# Altium PCB WallDigitalClock.PcbDoc
Units mm, origin at the board's own origin, x right, y up, seen from the top; angles counter-clockwise.
Board outline 214 x 90 mm, 2 copper layers (Top Layer, Bottom Layer); 8 components, 17 nets, 52 pads, 0 vias.
Unrouted connection lines stored in the file: 31.
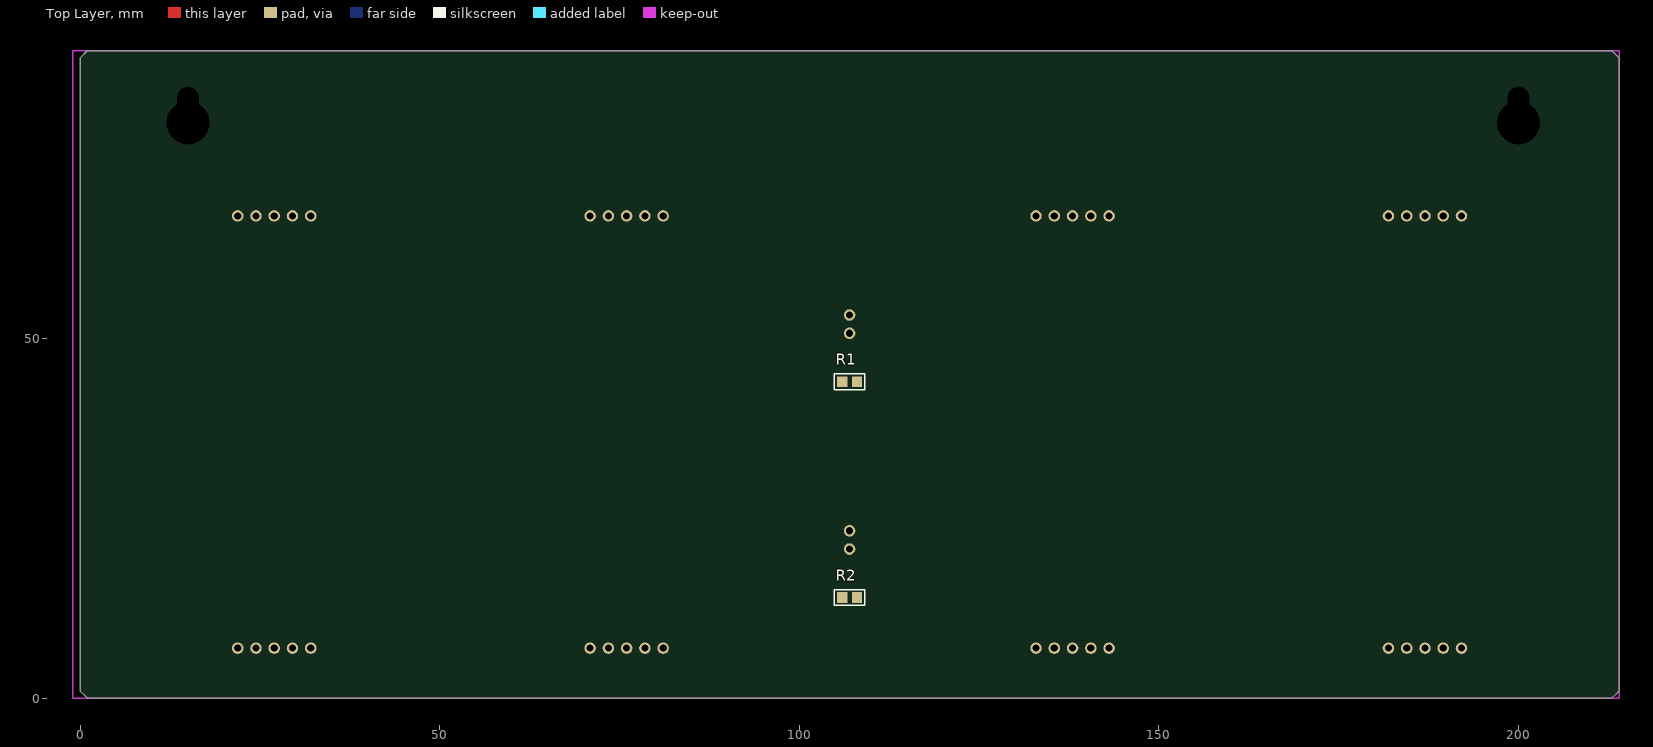
[diagram p0: Top Layer view]
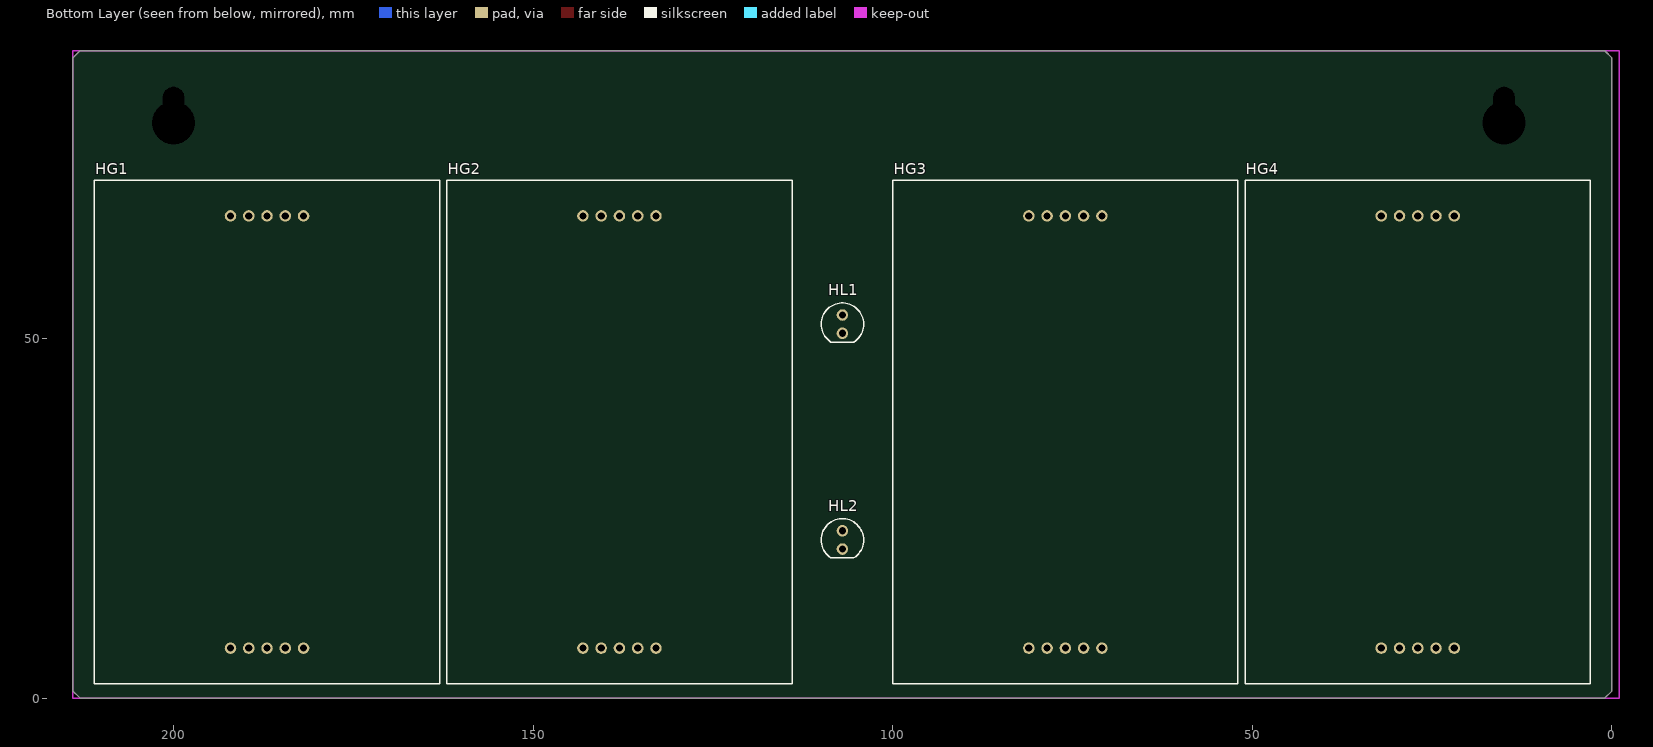
[diagram p1: Bottom Layer view, seen from below]

## Layer stack, top to bottom
Top Solder: solder mask 0.0102, Solder Resist, Dk 3.5
Top Layer: signal copper 0.0356
Dielectric 1: dielectric 0.32, FR-4, Dk 4.8
Bottom Layer: signal copper 0.0356
Bottom Solder: solder mask 0.0102, Solder Resist, Dk 3.5

## Board outline
1,0 213,0 214,1 214,89 213,90 1,90 0,89 0,1

## Design rules (kind name [scope] priority, off if disabled: settings)
Clearance [All] p1: gap=0.254 ignorepadtopadclearanceinfootprint=FALSE except(0: Arc-Hole Track-Hole SMDPad-Hole THPad-Hole Via-Hole Fill-Hole Poly-Hole Region-Hole Text-Hole)
PolygonConnect [All] p1: connectstyle=Relief reliefconductorwidth=0.254 reliefentries=4 polygonreliefangle="90 Angle" airgapwidth=0.254
RoutingVias [All] p1: holewidth=0.711 width=1.27 viastyle="Through Hole" minholewidth=0.711 minwidth=1.27 maxholewidth=0.711 maxwidth=1.27
SolderMaskExpansion [All] p1: expansion=0.102
Width [All] p1: maxlimit=0.254 minlimit=0.254 preferedwidth=0.254
30 further rules are at their usual default settings.

## Components (designator, comment, footprint, x,y, rotation, side; value= is the part's Value field where it differs from the comment)
HG1 "SA23-11" SA23-11 187,37 r180 bottom locked value=SA23-11GWA
HG2 "SA23-11" SA23-11 138,37 r180 bottom locked value=SA23-11GWA
HG3 "SA23-11" SA23-11 76,37 r180 bottom locked value=SA23-11GWA
HG4 "SA23-11" SA23-11 27,37 r180 bottom locked value=SA23-11GWA
HL1 "Green" LED_5mm_Green 107,52 r270 bottom value=L-1503GT
HL2 "Green" LED_5mm_Green 107,22 r270 bottom value=L-1503GT
R1 "Resistor" RES0805WS 107,44 r0 top value=Value
R2 "Resistor" RES0805WS 107,14 r0 top value=Value

## Footprints (in the part's own frame and the unit in brackets; to place one, negate y for a bottom-side part, rotate by r counter-clockwise, add the part's x,y. Pads: shape width x height; smd on the part's side, far side on the other; paste and mask are expansions set on the pad)
LED_5mm_Green [mm] "Single LED, Pinch 2.54mm, Size 5mm"
  round 1.6 hole 1: 1(-1.27,0) 2(1.27,0)
  silkscreen extent -2.95,-2.95 2.5,2.95, body extent -2.98,-3.01 2.44,3.01, height 12.31
RES0805WS [mm] "Resistor 0805 Wave Soldering"
  rect 1.4x1.5 smd: 1(-1.025,0) 2(1.025,0)
  silkscreen extent -2.1,-1.1 2.1,1.1, body extent -1,-0.63 1,0.63, height 0.48
SA23-11 [mm] "7-Segment Display, 57mm (2.3 inch)"
  round 1.6 hole 1: 1(-5.08,-30.05) 2(-2.54,-30.05) 3(0,-30.05) 4(2.54,-30.05) 5(5.08,-30.05) 6(5.08,30.05) 7(2.54,30.05) 8(0,30.05) 9(-2.54,30.05) 10(-5.08,30.05)
  silkscreen extent -24,-35 24,35, body extent -24,-35 24,35, height 12

## Part data
HG1 HG2 HG3 HG4: "Single Digit Numeric Display 57mm (2.3INCH), Common Anode", Manufacturer=Kingbright, HelpURL=https://www.chipdip.ru/product/sa23-11gwa?from=visited_product
HL1 HL2: library part LED

## Free pads (board coordinates)
  round 0 hole 6 unplated: 0(15,80) 0(200,80)
  round 0 hole 3 slot 6 at 90 deg unplated: 0(15,82) 0(200,82)

## Nets (pads, with @x,y where several pads share a name; then routed paths per layer and width w, separated by ;. In a path a pad name is that pad's centre, name@x,y a point inside that pad or via, vN(x,y) a via of type N, cw(c..) or ccw(c..) an arc to the next point about the centre after c; other vN are vias at no path point)
DIG.1: HG1.1 HG1.5
DIG.2: HG2.1 HG2.5
DIG.3: HG3.1 HG3.5
DIG.4: HG4.1 HG4.5
DOT.A: R1.2
DOT.B: R2.2
DP: HG1.8 HG2.8 HG3.8 HG4.8
GND: HL1.1 HL2.1
NetHL1_2: HL1.2 R1.1
NetHL2_2: HL2.2 R2.1
SEG.A: HG1.7 HG2.7 HG3.7 HG4.7
SEG.B: HG1.6 HG2.6 HG3.6 HG4.6
SEG.C: HG1.4 HG2.4 HG3.4 HG4.4
SEG.D: HG1.3 HG2.3 HG3.3 HG4.3
SEG.E: HG1.2 HG2.2 HG3.2 HG4.2
SEG.F: HG1.9 HG2.9 HG3.9 HG4.9
SEG.G: HG1.10 HG2.10 HG3.10 HG4.10

## Keep-outs
Keep-Out Layer:
  lines w0.2: -1,0 214,0 214,90 -1,90 -1,0

## Dimensions
-1,90 to 214,90 on Size
-1,0 to -1,90 on Size